# Altium PCB pcb.PcbDoc (part 2 of 2)
Units mil, origin at the board's own origin, x right, y up, seen from the top; angles counter-clockwise.
Board outline 1472.44 x 1500 mil, 2 copper layers (Top Layer, Bottom Layer); 119 components, 90 nets, 409 pads, 148 vias.
Unrouted connection lines stored in the file: 1.
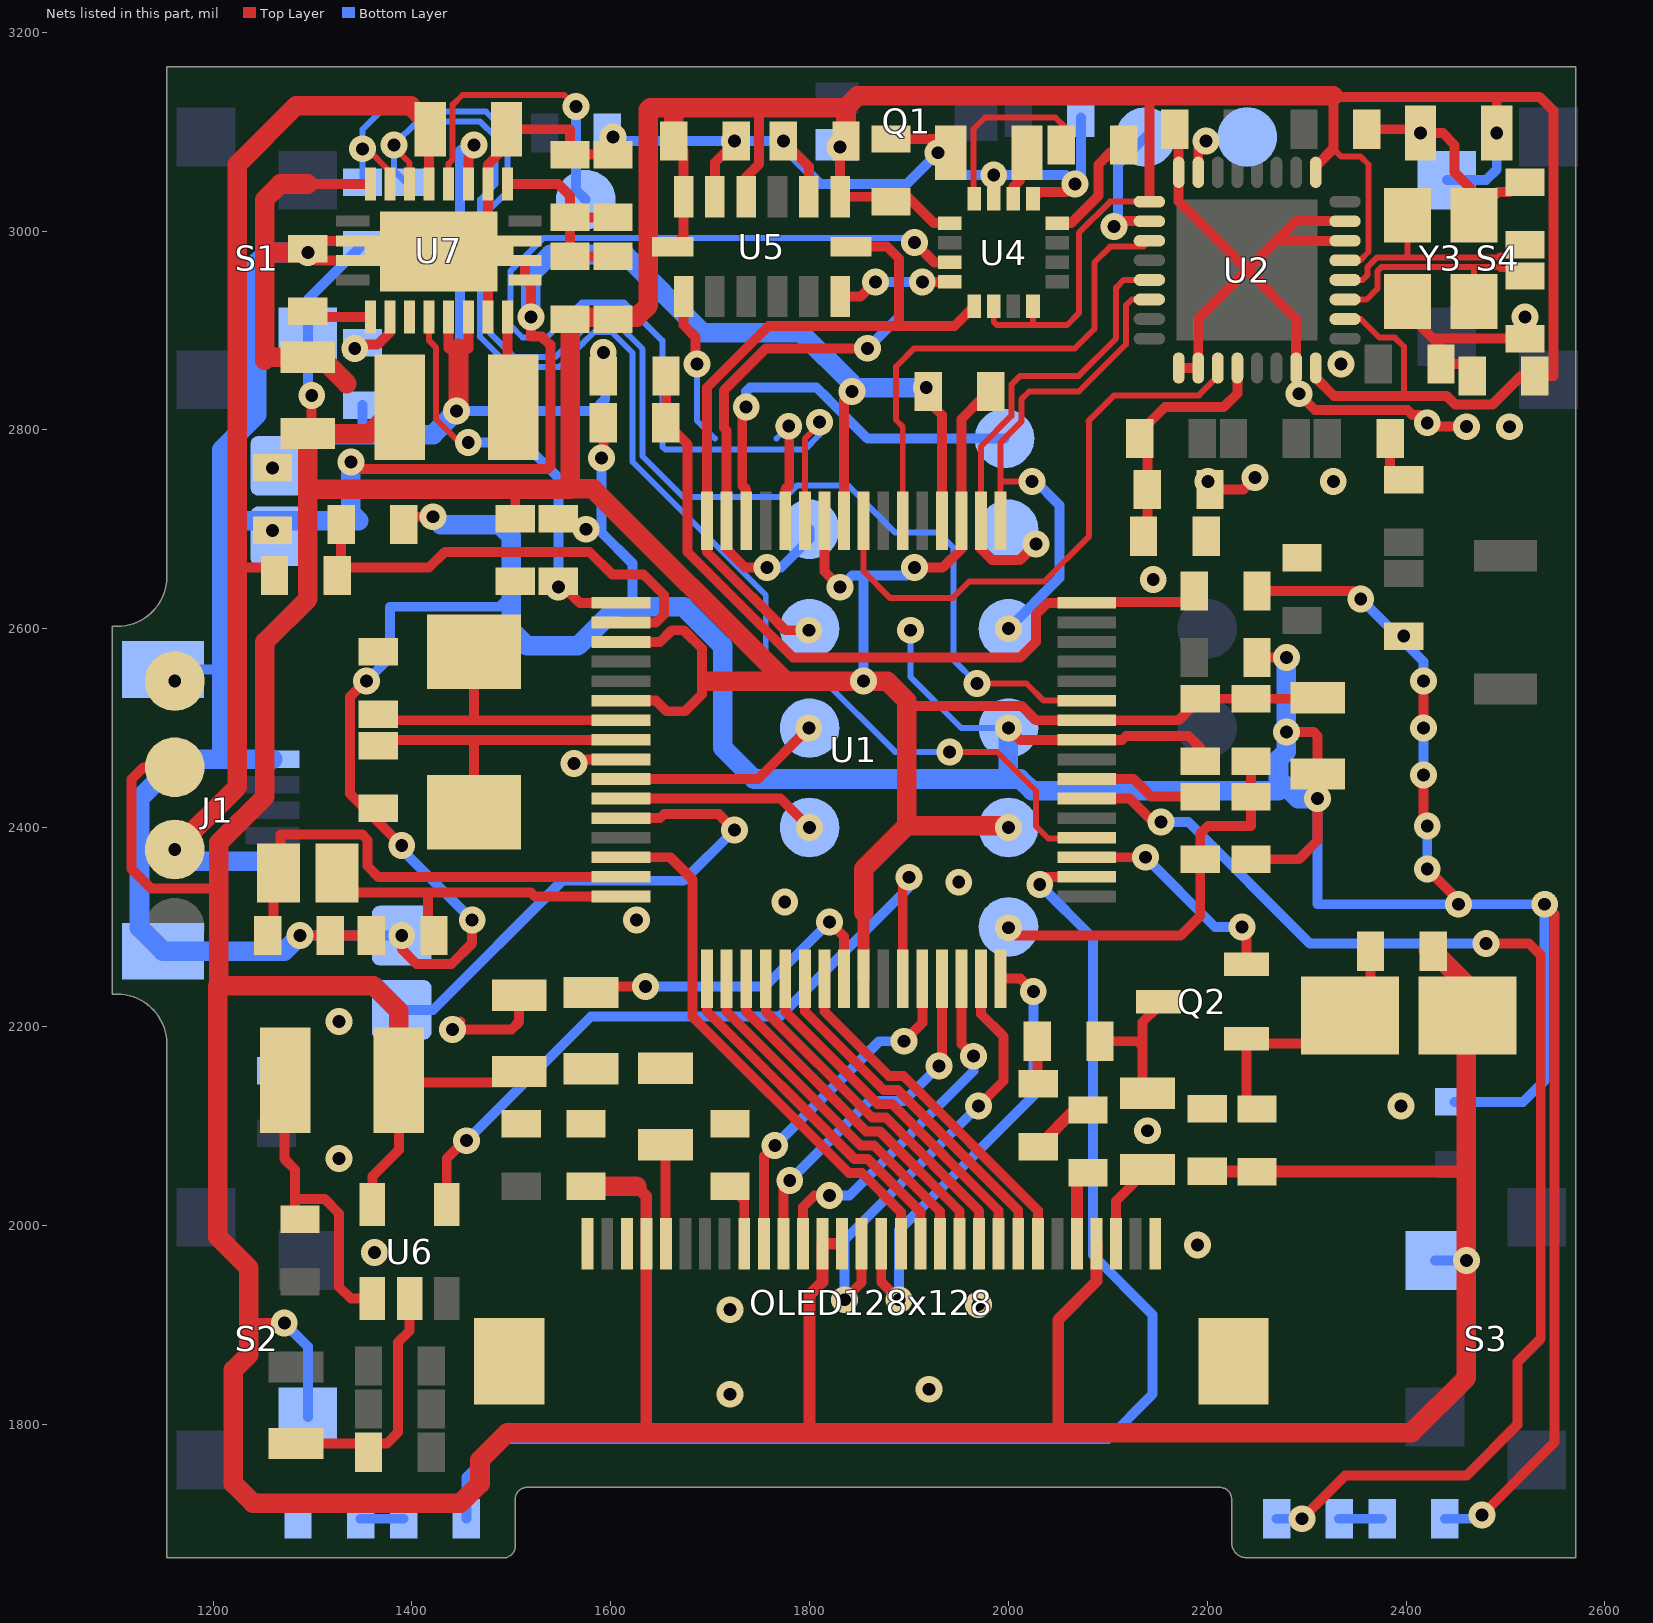
[diagram p2: the nets of this part, all layers, seen from the top]

## Via types
v1: diameter 27.01, hole 13, Top Layer to Bottom Layer, tented both sides, 139 vias
v2: diameter 27.01, hole 12.99, Top Layer to Bottom Layer, tented both sides, 9 vias

## Nets (pads, with @x,y where several pads share a name; then routed paths per layer and width w, separated by ;. In a path a pad name is that pad's centre, name@x,y a point inside that pad or via, vN(x,y) a via of type N, cw(c..) or ccw(c..) an arc to the next point about the centre after c; other vN are vias at no path point) (continued)
GND: C1.2 C2.2 C3.2 C4.2 C5.2 C6.2 C7.2 C8.2 C9.2 C10.2 C11.2 C12.2 C13.2 C15.2 C17.2 C18.2 C19.2 C20.2 C21.2 C23.2 C24.2 C25.2 C26.2 C27.2 C28.1 C30.2 C31.1 C32.2 C33.2 C34.2 C35.2 C37.2 C39.2 C40.2 C41.1 C42.2 D3.2 J1.5 OLED128x128.1 OLED128x128.28 OLED128x128.30 OLED128x128.31 OLED128x128.32 Q2.3 R3.2 R5.2 R7.1 R8.1 R9.2 R10.2 R11.2 R12.2 R15.1 R16.2 R18.2 R19.1 R20.1 R21.1 R27.2 TP1.1 TP10.1 TP12.1 TP18.1 U1.9 U1.20 U1.25 U1.41 U2.8 U2.17 U2.18 U2.23 U2.30 U2.31 U4.9 U4.11 U5.2 U5.5 U6.2 U7.0 U7.3 U7.9 U7.18 U7.20 Y3.2 Y3.4 | length 10807.4
  Top Layer w10: C20.2@1283.46,1780.51 1375,1780.51 1385.83,1791.34 1385.83,1881.89 1397.64,1893.7 U6.2@1397.64,1926.18 ; v1(1287.4,2291.34) C9.2@1317.92,2291.34 ; R27.2@1295.27,2982.29 v1(1295.27,2978.35) ; 1295.28,3047.24 U7.9@1358.27,3047.24 ; C9.2@1321.85,2291.34 C10.2@1355.31,2291.34 ; v1@1323.74,2207.76 v1(1326.77,2204.72) ; v1(1338.58,2767.71) 1345.54,2760.75 1536.34,2760.75 1539.37,2763.78 1539.37,2885.83 1538.54,2885.83 1530.67,2893.7 1519.68,2893.7 v1(1519.68,2913.39) 1519.68,2944.88 U7.20@1513.78,2950.79 U7.0@1513.78,2970.47 ; U7.0@1340.55,2970.47 1303.15,2970.47 v1(1295.27,2978.35) ; U7.0@1340.55,2990.16 1307.08,2990.16 v1(1295.27,2978.35) ; v1(1354.33,2547.24) 1353.49,2547.24 1337.52,2531.27 1337.52,2434.14 v1(1389.76,2381.89) ; v1(1389.76,2291.33) 1389.76,2277.71 1404.76,2262.71 1439.72,2262.71 1460.63,2283.62 v1(1460.63,2307.09) ; R20.1@1391.73,2712.6 v1(1421.26,2712.6) ; v1@1448.82,2204.72 v1(1440.94,2196.85) 1500,2196.85 1507.88,2204.72 C40.2@1507.88,2231.3 ; U7.18@1476.38,2913.39 U7.0@1476.38,2948.82 ; U7.0@1476.38,3011.81 U7.3@1476.38,3047.24 1476.38,3066.93 1495.08,3085.63 C26.2@1495.08,3102.36 1559.05,3102.36 R18.2@1559.05,3076.77 C37.2@1602.36,3076.78 ; v1(1562.99,2464.56) 1566.93,2468.5 U1.41@1610.24,2468.5 ; OLED128x128.30@1576.77,1981.3 OLED128x128.30@1576.77,1994.09 ; v1(1590.55,2771.65) 1592.52,2773.62 R3.2@1592.52,2807.08 ; C37.2@1602.36,3076.78 v1(1602.36,3094.49) ; U5.5@1704.72,3034.45 1704.72,3068.9 C13.2@1726.38,3090.55 ; v1(1773.62,3090.55) 1799.21,3064.95 U5.2@1799.21,3034.45 ; U1.25@1834.65,2708.66 1834.65,2830.71 v1(1842.52,2838.58) ; C11.2@1881.89,3092.52 C15.2@1928.15,3092.52 ; v1(1917.32,2842.52) 1917.32,2830.71 1933.07,2814.96 1933.07,2759.84 U1.20@1933.07,2708.66 ; v1(1929.13,3078.74) C15.2@1941.93,3078.74 ; U4.11@1985.24,3032.48 v1(1985.24,3056.16) ; v1(2000,2500) 2011.81,2488.19 U1.9@2078.74,2488.19 2114.17,2488.19 2118.11,2492.13 2181.1,2492.13 2192.92,2480.31 C2.2@2192.92,2466.53 ; U4.9@2024.61,3032.48 2031.5,3039.37 v1@2057.99,3039.37 ; D3.2@2092.09,2185 2129.99,2185 2134.99,2180 ; C17.2@2134.99,2137.76 2134.99,2180 ; Q2.3@2150.71,2220 2135,2204.29 2135,2180 ; C34.2@2167.32,3102.36 2171.26,3098.42 U2.8@2171.26,3059.05 2171.26,3029.53 2240.16,2960.63 ; U2.17@2171.26,2862.2 U2.18@2190.94,2862.2 2190.94,2911.42 2240.16,2960.63 ; C35.2@2202.76,2740.16 2236.22,2740.16 v1(2248.03,2751.97) ; C1.2@2244.1,2368.11 2292.32,2368.11 2311.02,2386.81 v1(2311.02,2429.13) C23.2@2311.02,2453.74 2311.02,2492.13 2307.09,2496.06 v1(2279.53,2496.06) ; C25.2@2250,2570.87 v1(2279.53,2570.87) ; C30.2@2250,2637.8 2346.45,2637.8 v1(2354.33,2629.92) ; v1@2326.77,2747.2 v1(2326.77,2748.03) ; U2.30@2338.58,2990.16 2269.68,2990.16 ; U2.31@2338.58,3009.84 2289.37,3009.84 2269.68,2990.16 ; C33.2@2360.24,3102.37 2410.43,3102.37 v1(2414.37,3098.43) 2437.01,3098.43 2448.82,3086.61 2448.82,3059.06 2468.5,3039.37 Y3.4@2468.5,3015.75 2492.13,3039.37 2503.94,3039.37 2513.78,3049.22 C42.2@2519.68,3049.22 ; Y3.2@2401.57,2929.13 2401.57,2917.32 2427.16,2891.74 ; v1(2417.32,2452.76) 2417.32,2405.5 v1(2421.26,2401.57) ; v1(2417.32,2500) v1(2417.32,2547.24) ; v1(2421.26,2358.27) 2452.76,2326.77 v1(2452.76,2322.83) ; v1(2460.63,2803.15) 2425.2,2803.15 v1(2421.26,2807.09) 2413.62,2814.73 2406.58,2814.73 2401.34,2819.96 2308.44,2819.96 v1(2292.13,2836.27) 2289.37,2839.03 U2.23@2289.37,2862.2 2289.37,2911.42 2240.16,2960.63 ; C28.1@2466.54,2854.33 2454.73,2866.14 R21.1@2435.04,2866.14 2435.04,2883.86 2427.16,2891.74 ; v1(2476.38,1708.66) 2549.37,1781.65 2549.37,2312.83 v1(2539.37,2322.83) ; v1(2519.68,2913.39) C41.1@2519.68,2891.74 2427.16,2891.74 ; 2240.16,2960.63 2269.68,2990.16
  Top Layer w19.68: v1(1295.27,2978.35) 1253.93,2978.35 1251.97,2980.32 ; 1295.28,3047.24 1267.72,3047.24 1251.97,3031.5 1251.97,2980.32 ; 1334.64,2846.45 1308.06,2873.03 C24.2@1295.28,2873.03 1254.92,2873.03 1251.97,2870.08 1251.97,2980.32
  Bottom Layer w6: v1@1901.57,2602.36 v1(1901.57,2598.43) 1901.57,2551.18 1952.76,2500 v1(2000,2500)
  Bottom Layer w10: J1.5@1149.61,2559.07 1208.65,2559.07 ; v1(1287.4,2291.34) v1(1389.76,2291.33) ; v1(1354.33,2547.24) 1377.95,2570.87 1377.95,2622.05 1488.19,2622.05 1500,2633.85 ; v1(1389.76,2381.89) 1389.76,2377.95 v1(1460.63,2307.09) ; v1(1562.99,2464.56) v1@1562.99,2468.5 ; v1(1590.55,2771.65) 1590.55,2696.85 1622.05,2665.35 1622.05,2622.05 ; R12.2@1596.46,3098.42 1604.34,3090.55 v1(1724.41,3090.55) v1(1773.62,3090.55) 1773.62,3084.65 1811.02,3047.24 1897.64,3047.24 v1(1929.13,3078.74) 1951.71,3056.16 v1(1985.24,3056.16) 2058.01,3056.16 v1(2066.93,3047.24) 2072.84,3053.15 R5.2@2072.84,3114.17 ; v1(2311.02,2429.13) 2311.02,2322.83 v1(2452.76,2322.83) v1(2539.37,2322.83) 2539.37,2145.67 2517.72,2124.02 R10.2@2448.82,2124.02 ; v1(2354.33,2629.92) 2417.32,2566.93 v1(2417.32,2547.24) ; v1(2417.32,2452.76) v1(2417.32,2500) ; v1(2421.26,2358.27) v1(2421.26,2401.57) ; R7.1@2438.97,1704.73 2472.44,1704.73 v1(2476.38,1708.66)
  Bottom Layer w19.68: J1.5@1259.84,2468.5 1208.66,2468.5 ; v1(1287.4,2291.34) 1271.65,2275.59 J1.5@1149.61,2275.59 1125.98,2299.21 1125.98,2429.13 1165.35,2468.5 1208.66,2468.5 ; v1(1295.27,2978.35) 1253.94,2978.35 1244.09,2968.5 1244.09,2815.25 1208.66,2779.82 1208.66,2708.66 ; v1(1338.58,2767.71) 1338.58,2716.54 1346.46,2708.66 1208.66,2708.66 ; v1(1421.26,2712.6) 1429.13,2704.72 1488.19,2704.72 1500,2692.92 1500,2633.85 1500,2598.43 1515.75,2582.68 1566.93,2582.68 1606.3,2622.05 1622.05,2622.05 1673.23,2622.05 1712.6,2582.68 1712.6,2480.32 1744.09,2448.82 2000,2448.82 ; v1(1519.68,2913.39) 1519.68,2956.69 1539.37,2976.38 1614.17,2976.38 1692.91,2897.64 1791.34,2897.64 1842.52,2846.46 v1(1842.52,2838.58) 1846.46,2842.52 v1(1917.32,2842.52) ; v1(2000,2500) 2000,2448.82 ; v1(2279.53,2570.87) v1(2279.53,2496.06) 2279.53,2476.38 2271.65,2468.5 2271.65,2448.82 ; v1(2311.02,2429.13) 2291.34,2429.13 2271.65,2448.82 ; 1208.66,2468.5 1208.66,2559.06 1208.66,2708.66 ; 2000,2448.82 2011.81,2448.82 2023.62,2437.01 2271.65,2437.01 2271.65,2448.82
  other v1: 1720,1830 1920,1835 1720,1915 1970,1920 1362.2,1972.44 2190,1980 1326.77,2066.93 2140,2095 2395,2120 1625.98,2307.09 1775,2325 1950,2345 1161.42,2547.24 2397.63,2592.52 2145.67,2649.61 1259.85,2698.81 1575,2700 2200.79,2748.03 2503.93,2803.14 2334.65,2866.14
INTA: U1.28 U5.8 | length 280.8
  Top Layer w10: U5.8@1673.23,2934.06 1673.23,2905.51 1685.04,2893.7 1685.04,2867.84 v1(1686.73,2866.14) ; U1.28@1775.59,2708.66 1775.59,2740.16 1779.53,2744.09 1779.53,2803.15 v1(1779.01,2803.67)
  Bottom Layer w6: v1(1686.73,2866.14) 1686.73,2809.33 1704.72,2791.34 ; 1766.67,2791.34 v1(1779.01,2803.67) v1@1768.24,2803.67
INTM: U1.27 U4.15 | length 1095.6
  Top Layer w6: U1.27@1795.28,2708.66 1795.28,2759.84 1795.28,2791.03 1809.95,2805.71 v1(1809.95,2807.68)
  Top Layer w10: v1(1905.63,2988.31) 1925.44,2968.5 U4.15@1940.94,2968.5
  Bottom Layer w6: v1@1809.95,2794.95 1795,2780 1655,2780 1651.86,2783.14 1651.86,2889.68 1613.34,2928.2 1571.09,2928.2 1535.83,2892.94 1511.22,2892.94 1499.24,2904.92 1499.24,2959.98 1532.42,2993.16 1900.78,2993.16 v1(1905.63,2988.31) ; v1@1809.95,2798.14 v1(1809.95,2807.68)
IREF: OLED128x128.22 R16.1 | length 63.7
  Top Layer w10: R16.1@1720,2039.1 1734.25,2024.84 OLED128x128.22@1734.25,1981.3
ISET1: R27.1 U7.12 | length 65.4
  Top Layer w10: R27.1@1295.27,2919.29 1301.18,2913.39 U7.12@1358.27,2913.39
ISET2: R26.1 U7.13 | length 57.4
  Top Layer w10: v1(1342.52,2881.89) 1346.46,2885.83 1365.59,2885.83 1377.95,2898.19 U7.13@1377.95,2913.39
LED1: LED1.1 U1.6 | length 1285.4
  Top Layer w10: U1.6@2078.74,2429.13 2122.05,2429.13 2145.67,2405.51 v1(2153.54,2405.51) ; v1(2295.28,1704.72) 2338.58,1748.03 2460.63,1748.03 2511.81,1799.21 2511.81,1862.2 2535.43,1885.83 2535.43,2271.65 2523.62,2283.46 v1(2480.32,2283.46)
  Bottom Layer w10: v1(2153.54,2405.51) 2181.1,2405.51 2303.15,2283.46 v1(2480.32,2283.46) ; LED1.1@2269.69,1704.72 v1(2295.28,1704.72)
LED2: LED2.1 U1.2 | length 1365.3
  Top Layer w10: v1@2039.37,2350.39 U1.2@2078.74,2350.39
  Bottom Layer w10: LED2.1@1454.72,1704.73 1454.72,1746.06 1493.66,1785 2100,1785 2145,1830 2145,1910 2085,1970 2085,2289.02 v1(2031.5,2342.52)
MCLR: C1.1 R4.2 R6.1 TP7.1 | length 406.4
  Top Layer w10: v1(2000,2299.21) 2007.87,2291.34 2173.23,2291.34 2192.91,2311.02 R6.1@2192.91,2368.11 2192.91,2393.7 2200.79,2401.57 2244.09,2401.57 C1.1@2244.1,2431.1 R4.2@2244.1,2466.53
NetC14_1: C14.1 U4.12 | length 197.2
  Top Layer w6: U4.12@1965.55,3032.48 1964.8,3033.24 1964.8,3102.59 1976.38,3114.17 2047.24,3114.17 2057.09,3104.33 C14.1@2057.09,3078.74
NetC14_2: C14.2 U4.8 | length 101
  Top Layer w10: U4.8@2049.21,3007.87 2062.99,3007.87 2090.55,3035.43 2090.55,3066.93 2102.37,3078.74
NetC15_1: C15.1 U4.10 | length 21.6
  Top Layer w10: U4.10@2004.92,3032.48 2004.92,3044.29 2011.81,3051.18
NetC21_1: C21.1 OLED128x128.26 | length 99.2
  Top Layer w10: OLED128x128.26@1655,1981.81 C21.1@1655,2080.98
NetC29_1: C29.1 L2.2 | length 27.6
  Top Layer w10: 2383.86,2763.78 L2.2@2383.86,2791.34
NetC38_2: C38.2 D4.1 M1.2 Q2.1 | length 265.1
  Top Layer w10: Q2.1@2239.29,2187.6 Q2.1@2239.29,2182.6 ; D4.1@2250,2116.9 2239.29,2127.61 Q2.1@2239.29,2182.6 ; C38.2@2364.17,2275.59 2364.17,2230.31 2316.46,2182.6 Q2.1@2239.29,2182.6
NetC41_2: C41.2 U2.27 Y3.3 | length 244.7
  Top Layer w6: U2.27@2338.58,2931.1 2360.24,2931.1 2371.02,2941.88 2371.02,2959.57 2375.08,2963.63 2468.5,2963.63 ; Y3.3@2468.5,2929.13 2468.5,2963.63 ; C41.2@2519.68,2950.79 2508.9,2961.57 2495.12,2961.57 2493.06,2963.63 2468.5,2963.63
NetC42_1: C42.1 U2.28 Y3.1 | length 242.7
  Top Layer w6: U2.28@2338.58,2950.79 2356.3,2950.79 2361.08,2955.57 2361.08,2963.68 2370.96,2973.57 2401.57,2973.57 ; Y3.1@2401.57,3015.75 2401.57,2973.57 ; C42.1@2519.68,2986.23 2508.9,2975.45 2494,2975.45 2492.13,2973.57 2401.57,2973.57
NetD2_1: D2.1 R14.1 | length 65.2
  Top Layer w11.81: D2.1@2030,2079.1 2066.8,2115.9 R14.1@2080,2115.9
NetD2_2: D2.2 D3.1 | length 43.3
  Top Layer w10: D3.1@2029.1,2185 2029.1,2142.99 D2.2@2030,2142.09
NetEPWR_1: EPWR.1 U7.5 | length 312.1
  Top Layer w6: U7.5@1437.01,3047.24 1437.01,3067.95 1440.99,3071.93 1440.99,3127.02 1450.83,3136.86 1553.33,3136.86 v1(1565.04,3125.15)
  Bottom Layer w10: v1(1565.04,3125.15) 1565.04,3041.26 EPWR.1@1574.8,3031.5
NetLED1_2: LED1.2 R7.2 | length 43.3
  Bottom Layer w10: LED1.2@2332.68,1704.72 R7.2@2375.98,1704.73
NetLED2_2: LED2.2 R8.2 | length 43.3
  Bottom Layer w10: R8.2@1348.43,1704.72 LED2.2@1391.73,1704.73
NetR6_2: R6.2 U1.7 | length 124.3
  Top Layer w10: U1.7@2078.74,2448.82 2126.01,2448.82 2143.72,2431.11 R6.2@2192.91,2431.11 R6.2@2190.94,2429.13
NetRXD_1: RXD.1 U2.10 | length 140.4
  Top Layer w10: v1(2106.3,3004.69) 2111.45,3009.84 U2.10@2141.73,3009.84
  Bottom Layer w10: v1(2106.3,3004.69) 2110.24,3008.63 2110.24,3066.93 RXD.1@2137.8,3094.49
NetTXD_1: TXD.1 U2.7 | length 34.6
  Top Layer w10: U2.7@2190.94,3059.05 2190.94,3082.96 v1(2198.54,3090.55)
OL_CS: OLED128x128.19 U1.62 | length 363.4
  Top Layer w10: OLED128x128.19@1793.31,1981.3 1793.31,2018.31 1805,2030 v1(1820,2030) ; U1.62@1952.76,2248.03 1952.76,2182.24 v1(1965,2170)
  Bottom Layer w10: v1(1820,2030) 1840,2030 1965,2155 v1(1965,2170)
OL_D0: OLED128x128.14 U1.46 | length 542.1
  Top Layer w10: U1.46@1610.24,2370.08 1659.92,2370.08 1682.01,2347.99 1682.01,2210.02 1839.59,2052.44 1852.56,2052.44 1891.73,2013.27 OLED128x128.14@1891.73,1981.3
OL_D1: OLED128x128.13 U1.49 | length 363.3
  Top Layer w10: U1.49@1696.85,2248.03 1696.85,2214.89 1845.36,2066.38 1858.91,2066.38 ; 1858.91,2066.09 1911.42,2013.58 OLED128x128.13@1911.42,1981.3
OL_D2: OLED128x128.12 U1.50 | length 363.5
  Top Layer w10: U1.50@1716.54,2248.03 1716.54,2214.92 1851.14,2080.32 1864.68,2080.32 1931.1,2013.9 OLED128x128.12@1931.1,1981.3
OL_D3: OLED128x128.11 U1.51 | length 363.6
  Top Layer w10: U1.51@1736.22,2248.03 1736.22,2214.94 1856.91,2094.25 1871.04,2094.25 ; 1871.04,2093.96 1950.79,2014.21 OLED128x128.11@1950.79,1981.3
OL_D4: OLED128x128.10 U1.52 | length 363.9
  Top Layer w10: U1.52@1755.91,2248.03 1755.91,2214.97 1862.68,2108.19 1876.81,2108.19 1970.47,2014.53 OLED128x128.10@1970.47,1981.3
OL_D5: OLED128x128.9 U1.53 | length 364.1
  Top Layer w10: U1.53@1775.59,2248.03 1775.59,2214.99 1868.45,2122.13 1882.87,2122.13 1990.16,2014.84 OLED128x128.9@1990.16,1981.3
OL_D6: OLED128x128.8 U1.54 | length 364.1
  Top Layer w10: U1.54@1795.28,2248.03 1795.28,2215.01 1874.23,2136.06 1888.65,2136.06 2009.84,2014.87 OLED128x128.8@2009.84,1981.3
OL_D7: OLED128x128.7 U1.55 | length 364.1
  Top Layer w10: U1.55@1814.96,2248.03 1814.96,2215.04 1880,2150 1894.42,2150 2029.53,2014.89 OLED128x128.7@2029.53,1981.3
OL_DC: OLED128x128.20 U1.61 | length 353.3
  Top Layer w10: OLED128x128.20@1773.62,1981.3 1773.62,2038.62 v1(1780,2045) ; v1(1930,2160) 1933.07,2163.07 U1.61@1933.07,2248.03
  Bottom Layer w10: v1(1780,2045) 1860,2125 1895,2125 v1(1930,2160)
OL_E: OLED128x128.15 U1.64 | length 467.9
  Top Layer w10: OLED128x128.15@1872.05,1981.3 1872.05,1942.95 v1(1890,1925) ; U1.64@1992.13,2248.03 2011.97,2248.03 v1(2025,2235)
  Bottom Layer w10: v1(1890,1925) 1890,1995 2025,2130 v1(2025,2235)
OL_RESET: OLED128x128.21 U1.60 | length 347.4
  Top Layer w10: OLED128x128.21@1753.94,1981.3 1753.94,2068.94 v1(1765,2080) ; v1(1895,2185) 1913.39,2203.39 U1.60@1913.39,2248.03
  Bottom Layer w10: v1(1765,2080) 1870,2185 v1(1895,2185)
OL_RW: OLED128x128.16 U1.63 | length 462.1
  Top Layer w10: v1(1835,1925) 1852.36,1942.36 OLED128x128.16@1852.36,1981.3 ; v1(1970,2120) 1995,2145 1995,2190 1972.44,2212.56 U1.63@1972.44,2248.03
  Bottom Layer w10: v1(1835,1925) 1835,1985 v1(1970,2120)
OL_SHDN: U1.59 U6.4 | length 738.9
  Top Layer w10: U6.4@1435.04,2020.67 1435.04,2066.93 1453.11,2085 v1(1455,2085) ; U1.59@1893.7,2248.03 1893.7,2343.7 v1(1900,2350)
  Bottom Layer w10: v1(1455,2085) 1580,2210 1770,2210 1900,2340 v1(1900,2350)
OSCI: C7.1 U1.39 Y1.1 | length 298.2
  Top Layer w10: C7.1@1378.94,2507.87 U1.39@1610.24,2507.87 ; 1462.6,2509.84 Y1.1@1462.6,2576.77
OSCO: C8.1 U1.40 Y1.2 | length 294.1
  Top Layer w10: C8.1@1375,2488.19 U1.40@1598.18,2488.19 ; Y1.2@1462.6,2415.35 1462.6,2486.22
PEIZO: TP11.1 U1.44 | length 512.3
  Top Layer w10: U1.44@1629.92,2409.45 1649.61,2409.45 1653.54,2413.39 1708.66,2413.39 v1(1724.41,2397.64)
  Bottom Layer w10: TP11.1@1389.76,2216.54 1421.26,2216.54 1551.18,2346.46 1673.23,2346.46 v1(1724.41,2397.64)
PGC: TP19.1 U1.17 U2.14 | length 534.6
  Top Layer w6: U1.17@1992.13,2708.66 1992.13,2748.03 ; v1(2023.62,2748.03) 1992.13,2748.03 ; U2.14@2141.73,2931.1 2124.02,2931.1 2118.3,2925.39 2118.3,2886.02 2070.87,2838.58 2020.81,2838.58 2012.93,2830.71 2012.93,2808.21 1992.13,2787.4 1992.13,2748.03
  Bottom Layer w10: v1(2000,2600) 2051.18,2651.18 2051.18,2724.41 v1@2027.56,2748.03
PGD: TP20.1 U1.18 U2.13 | length 462
  Top Layer w6: U1.18@1972.44,2708.66 1972.44,2783.46 2003,2814.02 2003,2845.52 2011.81,2854.33 2070.87,2854.33 2108.36,2891.83 2108.36,2943.01 2116.14,2950.79 U2.13@2141.73,2950.79
  Top Layer w10: U1.18@1972.44,2708.66 1972.44,2680.27 1983.42,2669.29 2011.81,2669.29 v1(2027.56,2685.03)
  Bottom Layer w10: v1(2027.56,2685.03) v1@2031.5,2688.98
PW_CE: R19.2 U1.33 U7.15 | length 435.1
  Top Layer w6: U7.15@1417.32,2913.39 1417.32,2889.76 1424.44,2882.65 1424.44,2810.43 1447.48,2787.4 v1(1456.69,2787.4)
  Top Layer w10: R19.2@1547.25,2647.64 1568.9,2625.98 U1.33@1610.24,2625.98
  Bottom Layer w10: v1(1456.69,2787.4) 1511.82,2787.4 1547.24,2751.97 v1(1547.24,2641.73)
PW_FB: C36.2 C37.1 R17.2 R18.1 U7.2 | length 215.5
  Top Layer w10: U7.2@1496.06,3047.24 1547.24,3047.24 1559.05,3035.44 R18.1@1559.05,3013.78 ; C36.2@1602.36,2974.41 R17.2@1559.05,2974.41 R18.1@1559.05,3013.78 ; C37.1@1602.36,3013.78 R18.1@1559.05,3013.78
PW_PG: U7.14
PW_SW: L5.1 U7.19 | length 91.4
  Top Layer w10: U7.19@1496.06,2913.39 1496.06,2824.8 L5.1@1498.03,2822.83
RD9: RD9.1 U1.43 | length 201.8
  Top Layer w10: U1.43@1610.24,2429.13 1770.87,2429.13 v1(1800,2400)
REFCLK: OSC.1 U1.30 | length 416
  Top Layer w10: U1.30@1736.22,2708.66 1736.22,2740.16 1732.28,2744.09 1732.28,2818.9 v1(1736.22,2822.83)
  Bottom Layer w10: v1(1736.22,2822.83) 1736.22,2838.58 1740.16,2842.52 1807.09,2842.52 1818.9,2830.71 1818.9,2830.47 1858.03,2791.34 OSC.1@1996.06,2791.34
RESET: U1.24 U2.19 | length 587.5
  Top Layer w6: U1.24@1854.33,2708.66 1854.33,2657.48 1880.78,2631.03 1944.25,2631.03 1960.63,2647.42 2035.73,2647.42 2080.8,2692.49 2080.8,2808.96 2080.71,2809.06 2106.43,2834.77 2191.52,2834.77 2210.63,2853.88 U2.19@2210.63,2862.2
RTCC: RTCC.1 U1.42 | length 210.2
  Top Layer w10: U1.42@1610.24,2448.82 1748.03,2448.82 v1(1799.21,2500)
SCK: U1.22 U2.11 | length 504.1
  Top Layer w6: U1.22@1893.7,2708.66 1893.7,2803.15 1886.94,2809.91 1886.94,2863.57 1905.27,2881.89 2066.93,2881.89 2086.61,2901.57 2086.61,2968.5 2102.36,2984.25 2135.83,2984.25 U2.11@2141.73,2990.16
SCL1: SCL.1 U1.32 U4.1 U5.14 | length 721.9
  Top Layer w10: U1.32@1696.85,2708.66 1696.85,2677.19 1722.48,2651.56 1759.84,2614.17 1775.59,2598.43 v1(1799.21,2598.43) ; U1.32@1696.85,2712.62 1696.85,2842.55 1758.75,2904.45 1889.76,2904.45 ; U5.14@1841.54,2984.25 1877.95,2984.25 1889.76,2972.44 1889.76,2904.45 ; U4.1@1965.55,2924.21 1945.79,2904.45 1889.76,2904.45
  Bottom Layer w10: v1(1799.21,2598.43) 1800,2599.21 SCL.1@1800,2600
SDA1: SDA.1 U1.31 U4.16 U5.13 | length 623.6
  Top Layer w10: U1.31@1716.54,2708.66 1716.54,2680.27 1735.12,2661.69 v1(1756.98,2661.69) ; U1.31@1716.54,2716.53 1716.54,2799.21 1713.78,2801.97 1713.78,2839.76 1755.91,2881.89 1858.03,2881.89 v1(1858.15,2882.01) ; U5.13@1830.71,2934.06 1851.38,2934.06 v1(1866.14,2948.82) ; v1(1913.38,2948.81) U4.16@1940.94,2948.82
  Bottom Layer w10: v1(1756.98,2661.69) 1771.38,2661.69 1800,2690.32 SDA.1@1800,2700 ; v1(1858.15,2882.01) 1889.76,2913.62 1889.76,2948.82 ; v1(1866.14,2948.82) 1889.76,2948.82 ; v1(1913.38,2948.81) 1889.76,2948.82
SOSCI: C9.1 U1.47 Y2.2 | length 472.9
  Top Layer w10: C9.1@1260.83,2291.34 Y2.2@1260.83,2349.41 ; Y2.2@1265.75,2354.33 1267.72,2356.3 1267.72,2392.8 1350.16,2392.8 1355.39,2387.56 1355.39,2361.14 1366.14,2350.39 U1.47@1610.24,2350.39
SOSCO: C10.1 U1.48 Y2.1 | length 311.4
  Top Layer w10: Y2.1@1338.58,2334.65 1519.68,2334.65 1523.62,2330.71 U1.48@1610,2330.71 ; C10.1@1416.34,2291.34 1416.34,2329.72
STAT1: R24.2 U1.4 U7.7 | length 1385.3
  Top Layer w6: v1@1381.18,3084.92 1397.64,3068.46 U7.7@1397.64,3047.24 ; v1(1940.91,2476.1) 1988.46,2476.1 2027.79,2436.78 2027.79,2401.35 2040.13,2389.01 U1.4@2077.98,2389.01
  Top Layer w10: v1@1381.18,3079.61 v1@1381.18,3084.92
  Bottom Layer w6: R24.2@1393.7,3049.22 1381.89,3061.03 v1(1381.89,3086.61) 1405.32,3110.05 1468.69,3110.05 1484.25,3094.49 1484.25,3047.24 1468.5,3031.5 1468.5,2893.5 1498.87,2863.13 1548.17,2863.13 1571.46,2886.42 1583.43,2898.39 1600.99,2898.39 1622.05,2877.34 1622.05,2767.72 1755.91,2633.86 1755.91,2574.8 1779.53,2551.18 1811.02,2551.18 1886.1,2476.1 v1(1940.91,2476.1)
STAT2: R22.2 U1.11 U7.8 | length 1394.5
  Top Layer w6: v1(1350.39,3082.68) 1354.89,3082.68 1377.95,3059.61 U7.8@1377.95,3047.24 ; v1(1968.32,2544.88) 2018.11,2544.88 2035.43,2527.56 U1.11@2078.74,2527.56
  Bottom Layer w6: R22.2@1350.4,3049.22 v1(1350.39,3082.68) 1350.39,3102.36 1368.02,3119.98 1474.5,3119.98 1496.06,3098.43 1496.06,3039.37 1478.44,3021.75 1478.44,2897.62 1502.99,2873.07 1544.06,2873.07 1579.32,2908.33 1605.11,2908.33 1631.98,2881.45 1631.98,2773.53 1673.23,2732.28 1775.59,2732.28 1787.4,2744.09 1838.58,2744.09 1885.83,2696.85 1929.13,2696.85 1944.88,2681.1 1944.88,2568.32 v1(1968.32,2544.88)
SW: D1.1 L1.2 U6.1 | length 299.3
  Top Layer w10: L1.2@1271.65,2125 1271.65,2066.93 1282.48,2056.1 1282.48,2026.57 ; D1.1@1287.4,2005.9 1282.48,2010.83 1282.48,2026.57 ; U6.1@1352.36,1918.31 U6.1@1360.24,1926.18 1338.58,1926.18 1326.77,1937.99 1326.77,2011.81 1312.01,2026.57 1282.48,2026.57
VBAT: C27.1 R1.1 R26.2 TP14.1 U7.4 U7.16 U7.17 | length 851.5
  Top Layer w10: U7.16@1437.01,2913.39 1437.01,2881.89 1446.85,2881.89 1456.69,2881.89 U7.17@1456.69,2913.39 ; U7.4@1456.69,3047.24 1456.69,3073.54
  Top Layer w19.68: v1(1444.88,2818.9) 1446.85,2820.87 1446.85,2881.89
  Bottom Layer w10: 1350.39,2795.28 R26.2@1350.39,2824.8 ; 1448.82,3081.42 1448.5,3081.1 1448.5,2876.59 1448.82,2876.27 1448.82,2822.83 v1(1444.88,2818.9) 1582.68,2818.9 1594.48,2830.71 v1@1594.48,2885.82
  Bottom Layer w19.68: 1279.53,2795.28 1350.39,2795.28 1421.26,2795.28 v1(1444.88,2818.9)
  other v1: 1259.85,2761.81 1592.52,2877.95 1462.6,3086.61
VBAT_SENSE: C30.1 R1.2 R3.1 U1.16 | length 799.5
  Top Layer w10: R1.2@1655.51,2854.33 R3.1@1655.51,2807.08 1677.17,2785.43 1677.17,2677.14 1783.44,2570.87 2011.81,2570.87 2027.56,2586.61 2027.56,2614.17 2039.37,2625.98 U1.16@2078.74,2625.98 ; U1.16@2059.06,2625.99 2059.99,2626.92 2186.08,2626.92 C30.1@2187.01,2625.99
VBUS: C26.1 J1.1 R2.2 U7.6 USB.1 | length 1113.8
  Top Layer w10: 1224.41,2661.42 R2.2@1265.75,2661.42 ; U7.6@1417.32,3047.24 C26.1@1417.32,3091.54
  Top Layer w19.68: v1(1161.42,2377.95) 1224.41,2440.94 1224.41,2661.42 1224.41,3066.93 1283.46,3125.98 1398.62,3125.98 C26.1@1406.5,3118.11
  Bottom Layer w19.68: v1(1161.42,2377.95) 1173.23,2366.14 J1.1@1259.84,2366.14
VBUS_SENSE: R2.1 R20.2 U1.34 | length 466.7
  Top Layer w10: R20.2@1328.74,2712.6 1328.74,2661.42 1417.32,2661.42 1433.07,2677.17 1578.74,2677.17 1601.46,2654.45 1632.95,2654.45 1653.54,2633.86 1653.54,2614.17 1645.67,2606.3 U1.34@1610.24,2606.3
VCAP: C6.1 U1.56 | length 332.4
  Top Layer w10: C6.1@1580,2234.02 1585.98,2240 v1(1635,2240) ; v1(1820,2305) 1834.65,2290.35 U1.56@1834.65,2248.03
  Bottom Layer w10: v1(1635,2240) 1755,2240 v1(1820,2305)
VCC: C2.1 C3.1 C4.1 C5.1 C11.1 C12.1 C13.1 C19.1 C23.1 C24.1 C28.2 C32.1 C36.1 C38.1 C40.1 D4.2 L1.1 L5.2 M1.1 OLED128x128.4 OLED128x128.17 OLED128x128.18 OLED128x128.27 Q1.1 R4.1 R17.1 R22.1 R24.1 S1.2 S2.2 S3.2 S4.2 TP17.1 U1.10 U1.19 U1.26 U1.35 U1.38 U1.57 U2.1 U2.9 U2.24 U2.26 U2.29 U4.2 U4.4 U4.13 U5.1 U5.4 U5.6 U5.7 U6.5 VCC.1 | length 10702.4
  Top Layer w6: U4.2@1985.24,2924.21 1985.24,2908.46 1988.24,2905.46 2023.62,2905.46 ; U4.4@2024.61,2924.21 2024.61,2906.45 2023.62,2905.46 ; U2.9@2141.73,3029.53 2102.23,3029.53 2070.87,2998.17 2070.87,2917.32 2059.01,2905.46 2023.62,2905.46 ; 2326.77,3082.68 2334.65,3074.8 2354.33,3074.8 2362.2,3066.93 2362.2,2978.86 2353.82,2970.47 U2.29@2338.58,2970.47 ; U2.26@2330.26,2911.42 U2.26@2338.58,2911.42 2354.6,2911.42 2373.26,2892.76 2388.7,2892.76 2397.64,2883.82 2397.64,2833.9
  Top Layer w10: VCC.1@1161.42,2460.63 1129.92,2460.63 1118.11,2448.82 1118.11,2358.27 1137.8,2338.58 1205.63,2338.58 ; 1235.94,1893.43 1244.09,1901.57 v1(1271.65,1901.57) ; C24.1@1295.28,2796.26 1299.21,2800.2 v1(1299.21,2834.65) ; U6.5@1360.24,2020.67 1360.24,2049.21 1386.81,2075.79 L1.1@1386.81,2145.67 1388.78,2143.7 C40.1@1507.87,2143.7 ; C4.1@1503.94,2710.63 1503.94,2740.15 ; U1.38@1610.24,2527.56 1645.43,2527.56 1656.06,2516.93 1674.65,2516.93 1691.73,2534.01 1691.73,2580.16 1673.47,2598.43 1661.42,2598.43 1649.61,2586.61 U1.35@1610.24,2586.61 ; U5.7@1662.4,2984.25 1673.23,2995.08 U5.6@1673.23,3034.45 C13.1@1673.23,3080.72 ; U5.4@1736.22,3034.45 1736.22,3054.29 1749.1,3067.17 1749.1,3120.98 1748.03,3122.05 ; U1.26@1814.96,2708.66 1814.96,2657.48 v1(1830.71,2641.73) ; C12.1@1836.61,3090.55 v1(1830.71,3084.65) U5.1@1830.71,3034.45 1898.62,3034.45 1925.2,3007.87 U4.13@1940.94,3007.87 ; 1897.64,2522.44 2012.99,2522.44 2027.56,2507.87 2125.98,2507.87 2171.23,2507.87 C2.1@2183.05,2519.69 ; v1(1905.51,2661.41) 1933.89,2661.41 1952.76,2680.27 U1.19@1952.76,2708.66 ; U1.19@1952.76,2731.46 1952.76,2811.02 C3.1@1972.44,2830.71 ; U2.9@2141.73,3029.53 2141.73,3135.83 ; C2.1@2192.92,2529.52 R4.1@2244.1,2529.52 2310.04,2529.52 C23.1@2311.02,2530.51 ; U2.24@2309.05,2862.2 2309.05,2852.36 2327.52,2833.9 2397.64,2833.9 2440.87,2833.9 2449.06,2825.71 2487.13,2825.71 2515.75,2854.33 C28.2@2529.53,2854.33 2548.3,2854.33 2548.3,3120.99 2534.37,3134.92 2488.19,3134.92 ; U2.1@2309.05,3059.05 2309.05,3064.96 2326.77,3082.68 2326.77,3135.83 2327.68,3134.92 2488.19,3134.92 ; C38.1@2417.33,2275.59 C38.1@2427.16,2275.59 ; v1(2491.14,3098.43) 2491.14,3131.97 2488.19,3134.92
  Top Layer w11.81: 1625.9,2039.1 1635.83,2029.17 OLED128x128.27@1635.83,1981.3 1635.83,1792.16 ; 1800,1791.34 1800,1930 1812.99,1942.99 OLED128x128.18@1812.99,1981.3 OLED128x128.17@1832.68,1981.3 ; U1.57@1854.33,2248.03 1854.33,2314.96 ; 2050,1791.34 2050,1905 2088.58,1943.58 OLED128x128.4@2088.58,1981.3 ; C5.1@2200,2054.1 D4.2@2249.81,2054.1 ; D4.2@2250,2053.91 2459.54,2053.91
  Top Layer w19.68: L5.2@1383.86,2822.83 1357.28,2796.26 C24.1@1295.28,2796.26 1295.28,2740.16 ; L1.1@1386.81,2145.67 1386.81,2215.55 1361.3,2241.06 1205.63,2241.06 ; 1559.05,2740.16 1503.94,2740.16 1295.28,2740.16 ; C19.1@1575,2039.1 1625.9,2039.1 ; C13.1@1663.39,3090.55 1663.39,3122.05 1661.42,3124.02 ; 1696.85,2547.24 1775.59,2547.24 ; C12.1@1836.61,3090.55 1836.61,3124.02 ; 1854.33,2314.96 1854.33,2358.27 1897.64,2401.57 ; v1(2000,2400) 1998.43,2401.57 1897.64,2401.57 ; 2326.77,3135.83 2141.73,3135.83 1848.42,3135.83 1836.61,3124.02 ; C38.1@2427.16,2275.59 2460.63,2242.12 v1(2460.63,1964.57) 2460.63,1846.46 2405.51,1791.34 2050,1791.34 1800,1791.34 1496.06,1791.34 1468.5,1763.78 1468.5,1740.16 1448.82,1720.47 1240.16,1720.47 1220.47,1740.16 1220.47,1854.33 1235.94,1869.8 1235.94,1893.43 1235.94,1956.97 1204.72,1988.19 1204.72,2240.16 1205.63,2241.06 ; 1205.63,2241.06 1205.63,2338.58 1205.63,2384.59 1251.97,2430.93 1251.97,2586.61 1295.28,2629.92 1295.28,2740.16 ; 1661.42,3124.02 1836.61,3124.02 ; 1661.42,3124.02 1639.77,3124.02 1637.8,3122.05 1637.8,2925.2 1625.98,2913.39 1606.07,2913.39 1605.79,2913.1 1560.74,2913.1 R17.1@1559.05,2911.42 1559.05,2740.71 1582.13,2740.71 1775.59,2547.24 ; 1775.59,2547.24 v1(1854.33,2547.24) 1877.95,2547.24 1897.64,2527.56 1897.64,2522.44 1897.64,2401.57
  Bottom Layer w10: v1(1271.65,1901.57) 1295.28,1877.95 S2.2@1295.28,1807.09 ; v1(1299.21,2834.65) 1295.28,2838.58 S1.2@1295.28,2893.7 1295.28,2931.1 R22.1@1350.4,2986.22 R24.1@1393.7,2986.22 ; v1(1830.71,2641.73) 1842.52,2653.54 1854.33,2653.54 ; v1(1854.33,2547.24) 1854.33,2653.54 ; v1(1905.51,2661.41) 1897.64,2653.54 1854.33,2653.54 ; S3.2@2429.13,1964.57 v1(2460.63,1964.57) ; S4.2@2440.94,3051.18 2480.32,3051.18 2491.14,3062.01 v1(2491.14,3098.43)
VCOMH: C17.1 OLED128x128.3 | length 87.8
  Top Layer w10: OLED128x128.3@2108.27,1981.3 2108.27,2024.25 C17.1@2140,2055.98
VDD_PA: C35.1 C39.1 L4.2 U2.20 | length 257.9
  Top Layer w10: L4.2@2125.98,2785.43 L4.2@2131.89,2791.34 ; C39.1@2135.83,2692.92 2139.77,2696.85 C35.1@2139.77,2740.16 2139.77,2783.45 L4.2@2131.89,2791.34 ; U2.20@2230.31,2862.2 2230.31,2836.61 2216.54,2822.83 2157.48,2822.83 2131.89,2797.24 L4.2@2131.89,2791.34
VMOTOR: Q2.2 U1.3 | length 229.7
  Top Layer w10: U1.3@2078.74,2370.08 v1(2137.8,2370.08) ; v1(2235,2300) 2239.29,2295.71 Q2.2@2239.29,2257.4
  Bottom Layer w10: v1(2137.8,2370.08) 2207.87,2300 v1(2235,2300)
VSL: OLED128x128.5 R14.2 | length 76.2
  Top Layer w11.81: OLED128x128.5@2068.9,1981.3 2068.9,2041.81 R14.2@2080,2052.91
pads on no net: ANT1.2 J1.4 OLED128x128.6 OLED128x128.23 OLED128x128.24 OLED128x128.25 OLED128x128.29 Q1.2 S1.3 S2.3 S3.3 S4.3 U1.5 U1.58 U2.4 U2.5 U2.6 U2.15 U2.32 U2.33 U4.3 U4.5 U4.6 U4.7 U4.14 U5.3 U5.9 U5.10 U5.11 U5.12 U7.1 U7.10 U7.11
copper on no net:
  other v2: 2192.91,2913.39 2240.16,2913.39 2287.4,2913.39 2192.91,2960.63 2240.16,2960.63 2287.4,2960.63 2192.91,3007.87 2240.16,3007.87 2287.4,3007.87

## Polygon pours and split planes (outlines as drawn)
GND on Top Layer "Bottom Layer-No Net" (solid, remove dead copper, pour order 16): 1153.54,3165.35 2559.06,3165.35 2566.93,3157.48 2566.93,1669.29 2236.22,1669.29 2232.28,1665.35 2224.41,1673.23 2224.41,1732.28 1500,1732.28 1496.06,1728.35 1496.06,1669.29 1153.54,1669.29 1149.61,1673.23 1149.61,2216.54 1133.86,2232.28 1098.43,2232.28 1098.43,2594.49 1090.55,2602.36 1098.43,2610.24 1118.11,2610.24 1129.92,2610.24 1153.54,2633.86
GND on Bottom Layer "Bottom Layer-No Net" (solid, remove dead copper, pour order 14): 1155.73,3164.11 2565.18,3164.11 2565.18,1664.11 2234.47,1664.11 2226.59,1671.99 2222.66,1675.92 2222.66,1734.98 1506.12,1734.98 1502.18,1738.92 1498.25,1734.98 1498.25,1671.99 1155.73,1671.99 1151.79,1675.92 1147.85,1679.86 1147.85,2199.55 1147.85,2207.42 1128.17,2227.1 1120.29,2234.98 1096.67,2234.98 1096.67,2601.12 1092.73,2605.06 1116.36,2605.06 1120.29,2605.06 1143.92,2628.68 1151.79,2636.55 1151.79,3160.18

## Keep-outs
Keep-Out Layer:
  the board outline again, w10

## Other copper
Top Layer:
  pour cut-out: 1929.13,3039.37 1929.13,2909.45 2062.99,2909.45 2062.99,3039.37
  region: 2560.7,2896.54
  region: 2560.7,2896.54
  region: 2560.7,2896.54
  pour cut-out: 2564.96,2342.52 2458.66,2342.52 cw(c2458.66,2362.2) 2438.98,2362.2 2438.98,2775.59 cw(c2458.66,2775.59) 2458.66,2795.28 2564.96,2795.28
Bottom Layer:
  pour cut-out: 1929.13,3039.37 1929.13,2909.45 2062.99,2909.45 2062.99,3039.37
  pour cut-out: 2564.96,2342.52 2458.66,2342.52 cw(c2458.66,2362.2) 2438.98,2362.2 2438.98,2775.59 cw(c2458.66,2775.59) 2458.66,2795.28 2564.96,2795.28

## Silkscreen, mask and mechanical layers (free items; w line width, h text height)
Top Overlay:
  circle w10: c1204.72,1720.47 r16.7
  lines w10: 1192.91,1763.78 1204.72,1775.59 ; 1216.54,1763.78 1204.72,1775.59 ; 1248.03,1708.66 1259.84,1720.47 ; 1248.03,1732.28 1259.84,1720.47 ; 1248.03,2393.7 1248.03,2614.17 1342.52,2614.17 1342.52,2393.7 ; 1472.44,2098.43 1480.32,2098.43 ; 1507.87,1763.78 1862.2,1763.78 2216.54,1763.78 ; 2562.99,2342.52 2460.63,2342.52 cw(c2460.63,2362.2) 2440.94,2362.2 2440.94,2779.53 cw(c2456.69,2779.53) 2456.69,2795.28 2562.99,2795.28 ; 1204.72,1775.59 1204.72,1720.47 1259.84,1720.47
  text "Y" at 1196.85,1791.34 h27.56
  text "X" at 1275.59,1708.66 h27.56
Bottom Overlay:
  lines w10: 2562.99,2342.52 2460.63,2342.52 cw(c2460.63,2362.2) 2440.94,2362.2 2440.94,2779.53 cw(c2456.69,2779.53) 2456.69,2795.28 2562.99,2795.28 ; 1417.32,1748.03 1417.32,3125.98 2401.57,3125.98 2401.57,1748.03 1417.32,1748.03
  text "OLED Watch" at 1988.19,1988.19 h47.24
  text "v0.10" at 1657.48,1933.07 h31.5
  text "Duinopeak 2016" at 1990,1870 h31.5
Top Solder:
  lines w47.24: 1098.43,2233.27 1103.54,2233.27 cw(c1103.54,2183.27) 1153.54,2183.27 1153.54,1666.34 1492.13,1666.34 ccw(c1492.13,1678.15) 1503.94,1678.15 1503.94,1725.39 cw(c1515.75,1725.39) 1515.75,1737.2 2212.6,1737.2 cw(c2212.6,1725.39) 2224.41,1725.39 2224.41,1682.09 ccw(c2240.16,1682.09) 2240.16,1666.34 2570.87,1666.34 2570.87,3166.34 1153.54,3166.34 1153.54,2653.35 cw(c1103.54,2653.35) 1103.54,2603.35 1098.43,2603.35 1098.43,2233.27